# Altium PCB RFM95W.PcbDoc
Units mm, origin at the board's own origin, x right, y up, seen from the top; angles counter-clockwise.
Board outline 31 x 25.5 mm, 2 copper layers (Top Layer, Bottom Layer), stack 1.671 mm thick; 4 components, 14 nets, 35 pads, 0 vias.
Unrouted connection lines stored in the file: 2.
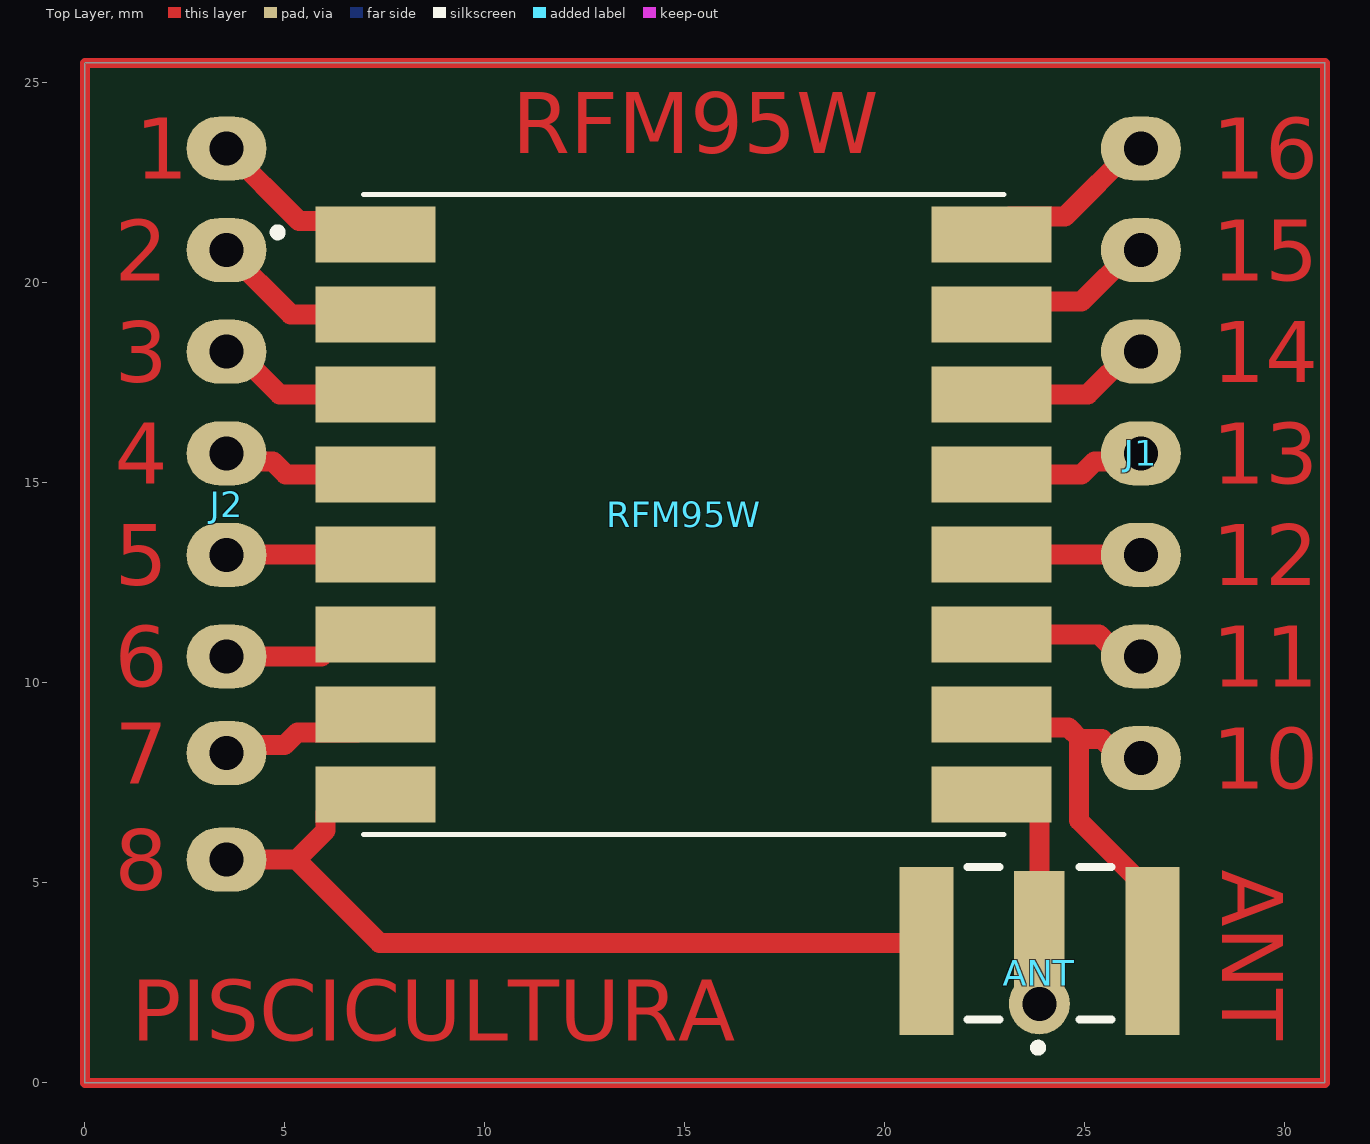
[diagram p0: Top Layer view]
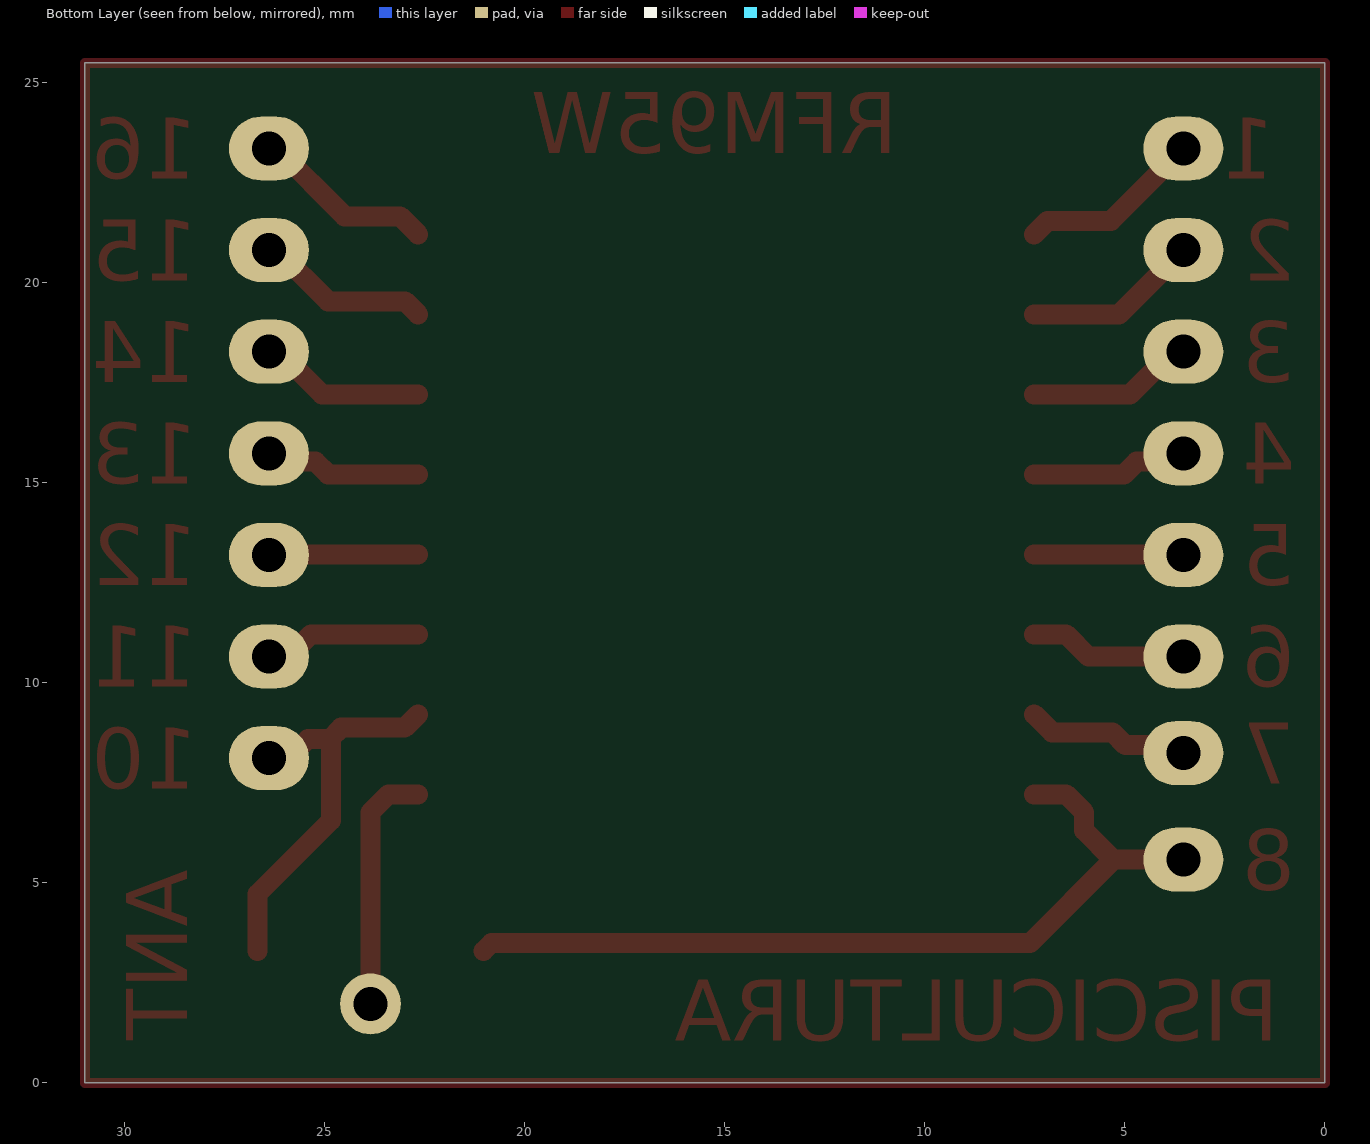
[diagram p1: Bottom Layer view, seen from below]
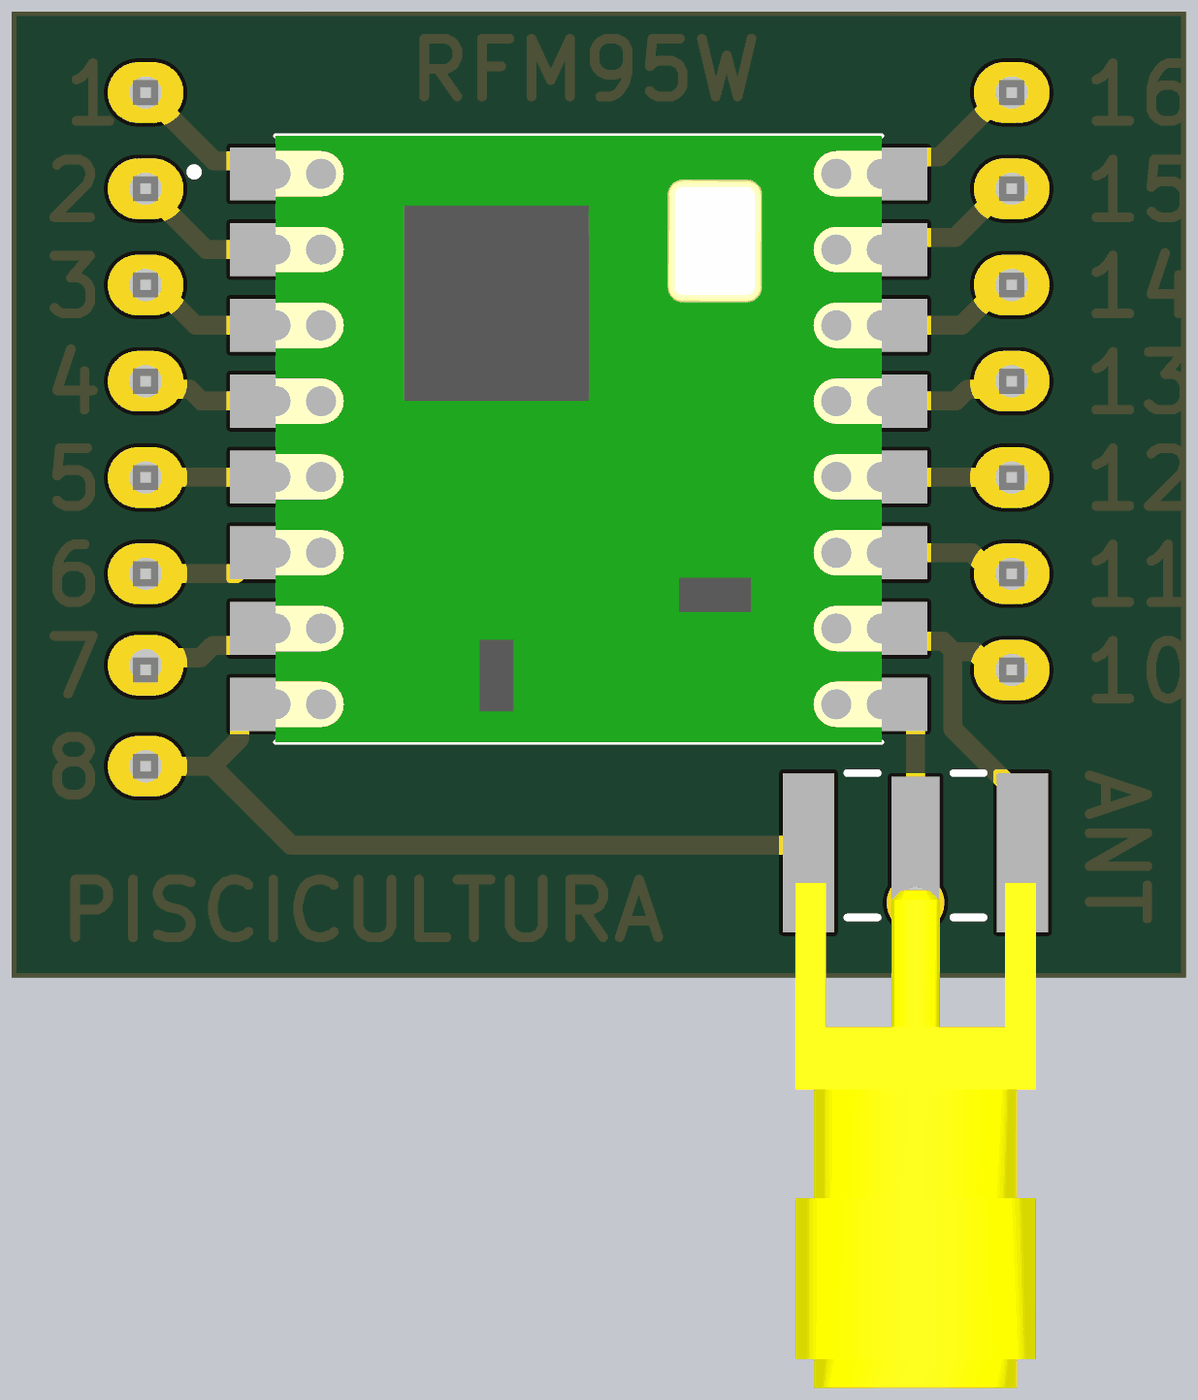
[diagram p2: 3D render of the assembled board from above, using the file's embedded part models]

## Layer stack, top to bottom
Top Solder: solder mask 0.0102, Solder Resist, Dk 3.5
Top Layer: signal copper 0.0356
Dielectric 1: dielectric 1.6, FR-4, Dk 4.8
Bottom Layer: signal copper 0.0356
Bottom Solder: solder mask 0.0102, Solder Resist, Dk 3.5

## Board outline
0,25.5 0,0 31,0 31,25.5

## Design rules (kind name [scope] priority, off if disabled: settings)
Clearance [All] p1: gap=0.4 ignorepadtopadclearanceinfootprint=FALSE
DiffPairsRouting [All] p1: maxlimit=0.254 minlimit=0.254 mostfreqgap=0.254 toplayer_minwidth=0.381 toplayer_maxwidth=0.381 toplayer_prefwidth=0.381 bottomlayer_minwidth=0.381 bottomlayer_maxwidth=0.381 bottomlayer_prefwidth=0.381 substack1={8DDF439F-6846-4610-86AD-6864254210AB} toplayer_{8ddf439f-6846-4610-86ad-6864254210ab}_minwidth=0.381 toplayer_{8ddf439f-6846-4610-86ad-6864254210ab}_maxwidth=0.381 toplayer_{8ddf439f-6846-4610-86ad-6864254210ab}_prefwidth=0.381 bottomlayer_{8ddf439f-6846-4610-86ad-6864254210ab}_minwidth=0.381 bottomlayer_{8ddf439f-6846-4610-86ad-6864254210ab}_maxwidth=0.381 bottomlayer_{8ddf439f-6846-4610-86ad-6864254210ab}_prefwidth=0.381 maxuncoupledlength=12.7
PolygonConnect [All] p1: connectstyle=Relief reliefconductorwidth=0.254 reliefentries=4 polygonreliefangle="90 Angle" airgapwidth=0.254
RoutingVias [All] p1: holewidth=0.3 width=0.6 viastyle="Through Hole" minholewidth=0.3 minwidth=0.6 maxholewidth=0.3 maxwidth=0.6
SolderMaskExpansion [All] p1: expansion=0.102 istentingtop=FALSE
Width [All] p1: maxlimit=0.5 minlimit=0.254 preferedwidth=0.254 substack1={8DDF439F-6846-4610-86AD-6864254210AB} minimp=50.000000 maximp=50.000000 favimp=50.000000
29 further rules are at their usual default settings.

## Components (designator, comment, footprint, x,y, rotation, side; value= is the part's Value field where it differs from the comment)
ANT "SMA-J-P-H-ST-EM1" SAMTEC_SMA-J-P-H-ST-EM1 23.86,3.5 r180 top
J1 "1x6 Header" HDR1X7 26.4,23.36 r0 top
J2 "1x8 Header" HDR1X8 3.54,23.36 r0 top
RFM95W "RFM95W-915S2" XCVR_RFM95W-915S2 14.97,14.215 r0 top

## Footprints (in the part's own frame and the unit in brackets; to place one, negate y for a bottom-side part, rotate by r counter-clockwise, add the part's x,y. Pads: shape width x height; smd on the part's side, far side on the other; paste and mask are expansions set on the pad)
HDR1X7 [mm]
  oval 2x1.6 hole 0.85 unplated: 10(0,-15.24) 11(0,-12.7) 12(0,-10.16) 13(0,-7.62) 14(0,-5.08) 15(0,-2.54) 16(0,0)
  body extent -1.18,-16.38 1.18,1.14, height 10.92
HDR1X8 [mm]
  oval 2x1.6 hole 0.85 unplated: 1(0,0) 2(0,-2.54) 3(0,-5.08) 4(0,-7.62) 5(0,-10.16) 6(0,-12.7) 7(0,-15.113) 8(0,-17.78)
  body extent -1.18,-18.92 1.18,1.14, height 1.52
SAMTEC_SMA-J-P-H-ST-EM1 [mm]
  round 1.524 hole 0.85 unplated: 1(0,1.524)
  rect 1.27x3.6 smd: 1(0,0)
  rect 1.35x4.2 smd: 2_1(-2.825,0.2) 3_1(2.825,0.2)
  silkscreen extent -1.8,-1.9 1.8,2.72, body extent -3.17,0.99 3.17,14.32, height 3.17
XCVR_RFM95W-915S2 [mm]
  rect 3x1.4 smd: 1(-7.7,7) 2(-7.7,5) 3(-7.7,3) 4(-7.7,1) 5(-7.7,-1) 6(-7.7,-3) 7(-7.7,-5) 8(-7.7,-7) 9(7.7,-7) 10(7.7,-5) 11(7.7,-3) 12(7.7,-1) 13(7.7,1) 14(7.7,3) 15(7.7,5) 16(7.7,7)
  silkscreen extent -10.25,-8 8,8, body extent -8,-8 8,8, height 1.8

## Part data
ANT: "SMA Connector Jack, Female Socket 50Ohm Board Edge, End Launch Solder", Package=None, Digi-Key_Part_Number=SAM8857-ND, MF=Samtec, MP=SMA-J-P-H-ST-EM1, SnapEDA_Link=https://www.snapeda.com/parts/SMA-J-P-H-ST-EM1/Samtec%20Inc./view-part/134500/?ref=snap, Toby_UK-Purchase-URL=https://snapeda.com/shop?store=Toby+UK&id=134500
J1: library part 22-10-2061_1, "CONN HEADER VERT 7POS 2.54MM", Color=White, Contact Resistance=10mR, Current Rating=4A, Flammability Rating="UL94 V-0", Housing Color=Black, Insulation Resistance=50GR, Manufacturer=Molex, Manufacturer Part Number=22-10-2061, Max Operating Temperature=75°C, Min Operating Temperature=0°C, Package Quantity=10, Supplier Part Number 1=23-0022102071-ND, Voltage Rating=250V, Category="Headers and Wire Housings", ComponentLink1Description=https://datasheet.ciiva.com/711/022032041-sd-711929.pdf?src-supplier=Digi-Key, ComponentLink1URL=https://datasheet.ciiva.com/711/022032041-sd-711929.pdf?src-supplier=Digi-Key, ComponentLink2Description=https://datasheet.ciiva.com/5158/0022102061-pcb-headers-158488-5158499.pdf?src-supplier=Mouser, ComponentLink2URL=https://datasheet.ciiva.com/5158/0022102061-pcb-headers-158488-5158499.pdf?src-supplier=Mouser, ComponentLink3Description=https://datasheet.ciiva.com/10086/0022102061-pcb-headers-10086323.pdf?src-supplier=Avnet, ComponentLink3URL=https://datasheet.ciiva.com/10086/0022102061-pcb-headers-10086323.pdf?src-supplier=Avnet, ComponentLink4Description=https://datasheet.ciiva.com/19461/1965971-19461525.pdf?src-supplier=Jameco, ComponentLink4URL=https://datasheet.ciiva.com/19461/1965971-19461525.pdf?src-supplier=Jameco, ComponentLink5Description=https://datasheet.ciiva.com/30196/0022102061-pcb-headers-30196683.pdf?src-supplier=Onlinecomponents.com, ComponentLink5URL=https://datasheet.ciiva.com/30196/0022102061-pcb-headers-30196683.pdf?src-supplier=Onlinecomponents.com, ComponentLink6Description=https://datasheet.ciiva.com/16727/0022102061-pcb-headers-16727098.pdf?src-supplier=Avnet+Europe, ComponentLink6URL=https://datasheet.ciiva.com/16727/0022102061-pcb-headers-16727098.pdf?src-supplier=Avnet+Europe, Connector Type="Male Pin", Contact Material=Brass, Contact Mating Length=0.295inch, Contact Plating=Gold,Copper,Tin, Contact Type="Male Pin", Depth=9.02mm, Gender=Male, Glow Wire Compliant=Non-compliant, Halogen Free="Low Halogen", Height=14.68mm, Housing Material=Nylon, Length=95mm, Mount="Through Hole", Number of Circuits=6, Number of Contacts=6, Number of Positions=6, Number of Rows=1, Orientation=Straight, Packaging=Bulk, Pitch=2.54mm, Pricing 1="1=1.33000, 10=1.10400, 100=0.92000, 1000=0.73600, 5000=0.64400, 10000=0.61180 (USD)", Radiation Hardening=No, REACH SVHC=Unknown, RoHS=Yes, RoHS Compliant=Yes, Series="KK® 4030", Stock 1=3643, Supplier 1=Digi-Key, Termination=Solder, Voltage Rating (DC)=250V
J2: library part 22-10-2061, "CONN HEADER VERT 8POS 2.54MM", Color=White, Contact Resistance=10mR, Current Rating=4A, Flammability Rating="UL94 V-0", Housing Color=Black, Insulation Resistance=50GR, Manufacturer=Molex, Max Operating Temperature=75°C, Min Operating Temperature=0°C, Package Quantity=10, Supplier Part Number 1=23-0022102081-ND, Voltage Rating=250V, Category="Headers and Wire Housings", ComponentLink1Description=https://datasheet.ciiva.com/711/022032041-sd-711929.pdf?src-supplier=Digi-Key, ComponentLink1URL=https://datasheet.ciiva.com/711/022032041-sd-711929.pdf?src-supplier=Digi-Key, ComponentLink2Description=https://datasheet.ciiva.com/5158/0022102061-pcb-headers-158488-5158499.pdf?src-supplier=Mouser, ComponentLink2URL=https://datasheet.ciiva.com/5158/0022102061-pcb-headers-158488-5158499.pdf?src-supplier=Mouser, ComponentLink3Description=https://datasheet.ciiva.com/10086/0022102061-pcb-headers-10086323.pdf?src-supplier=Avnet, ComponentLink3URL=https://datasheet.ciiva.com/10086/0022102061-pcb-headers-10086323.pdf?src-supplier=Avnet, ComponentLink4Description=https://datasheet.ciiva.com/19461/1965971-19461525.pdf?src-supplier=Jameco, ComponentLink4URL=https://datasheet.ciiva.com/19461/1965971-19461525.pdf?src-supplier=Jameco, ComponentLink5Description=https://datasheet.ciiva.com/30196/0022102061-pcb-headers-30196683.pdf?src-supplier=Onlinecomponents.com, ComponentLink5URL=https://datasheet.ciiva.com/30196/0022102061-pcb-headers-30196683.pdf?src-supplier=Onlinecomponents.com, ComponentLink6Description=https://datasheet.ciiva.com/16727/0022102061-pcb-headers-16727098.pdf?src-supplier=Avnet+Europe, ComponentLink6URL=https://datasheet.ciiva.com/16727/0022102061-pcb-headers-16727098.pdf?src-supplier=Avnet+Europe, Connector Type="Male Pin", Contact Material=Brass, Contact Mating Length=0.295inch, Contact Plating=Gold,Copper,Tin, Contact Type="Male Pin", Depth=9.02mm, Gender=Male, Glow Wire Compliant=Non-compliant, Halogen Free="Low Halogen", Height=14.68mm, Housing Material=Nylon, Length=95mm, Manufacturer Part Number=22-10-2061, Mount="Through Hole", Number of Circuits=6, Number of Contacts=6, Number of Positions=6, Number of Rows=1, Orientation=Straight, Packaging=Bulk, Pitch=2.54mm, Pricing 1="1=1.33000, 10=1.10400, 100=0.92000, 1000=0.73600, 5000=0.64400, 10000=0.61180 (USD)", Radiation Hardening=No, REACH SVHC=Unknown, RoHS=Yes, RoHS Compliant=Yes, Series="KK® 4030", Stock 1=3643, Supplier 1=Digi-Key, Termination=Solder, Voltage Rating (DC)=250V
RFM95W: "RFM95(W) - Low Power Long Range Transceiver Module V1.0", Package=None, Availability=Unavailable, MF="{'manufacturer': u'RF Solutions'}", MP=RFM95W-915S2, Price=None

## Nets (pads, with @x,y where several pads share a name; then routed paths per layer and width w, separated by ;. In a path a pad name is that pad's centre, name@x,y a point inside that pad or via, vN(x,y) a via of type N, cw(c..) or ccw(c..) an arc to the next point about the centre after c; other vN are vias at no path point)
+3.3V: J1.13 RFM95W.13 | length 3.9
  Top Layer w0.5: RFM95W.13 24.92,15.215 25.235,15.53 26.19,15.53 J1.13
ANT: ANT.1 RFM95W.9 | length 6.1
  Top Layer w0.5: RFM95W.9 23.41,7.215 23.86,6.765 ANT.1@23.86,2.04
DIO0: J1.14 RFM95W.14 | length 4.2
  Top Layer w0.5: RFM95W.14 25.073,17.215 26.138,18.28 J1.14
DIO1: J1.15 RFM95W.15 | length 4.4
  Top Layer w0.5: RFM95W.15 22.995,19.54 24.92,19.54 26.2,20.82 J1.15
DIO2: J1.16 RFM95W.16 | length 4.6
  Top Layer w0.5: RFM95W.16 23.12,21.665 24.505,21.665 26.2,23.36 J1.16
DIO3: J1.11 RFM95W.11 | length 4
  Top Layer w0.5: RFM95W.11 25.347,11.215 25.902,10.66 J1.11
DIO4: J1.12 RFM95W.12 | length 3.7
  Top Layer w0.5: RFM95W.12 22.677,13.207 26.392,13.207 J1.12
DIO5: J2.7 RFM95W.7 | length 4.1
  Top Layer w0.5: J2.7 3.736,8.443 4.991,8.443 5.313,8.765 6.82,8.765 RFM95W.7
GND: ANT.2_1 ANT.3_1 J1.10 J2.1 J2.8 RFM95W.1 RFM95W.8 RFM95W.10 | length 36.2
  Top Layer w0.5: J2.8 5.29,5.58 ; J2.1 5.347,21.553 6.932,21.553 RFM95W.1 ; RFM95W.8 6.47,7.215 6.02,6.765 6.02,6.31 5.29,5.58 ; ANT.3_1 20.835,3.5 7.37,3.5 5.29,5.58 ; RFM95W.10 23.005,8.88 24.595,8.88 24.875,8.6 ; J1.10 25.902,8.12 25.422,8.6 24.875,8.6 ; ANT.2_1 26.685,4.725 24.85,6.56 24.85,8.575 24.875,8.6
MISO: J2.2 RFM95W.2 | length 4.4
  Top Layer w0.5: J2.2 5.145,19.215 RFM95W.2
MOSI: J2.3 RFM95W.3 | length 4.2
  Top Layer w0.5: J2.3 3.802,18.28 4.867,17.215 RFM95W.3
NSS: J2.5 RFM95W.5 | length 3.7
  Top Layer w0.5: J2.5 3.548,13.207 7.263,13.207 RFM95W.5
RESET: J2.6 RFM95W.6 | length 4
  Top Layer w0.5: J2.6 5.915,10.66 6.47,11.215 RFM95W.6
SCK: J2.4 RFM95W.4 | length 3.9
  Top Layer w0.5: J2.4 3.75,15.53 4.705,15.53 5.02,15.215 RFM95W.4
copper on no net: | length 113
  Top Layer w0.254: 0,0 31,0 31,25.5 0,25.5 0,0

## Polygon pours and split planes (outlines as drawn)
no net on Top Solder (none): 0.975,2.875 18.775,2.875 18.775,0.85 18.7,0.925 0.975,0.925

## Other copper
Top Layer:
  text "PISCICULTURA" at 1.154,1.054 h1.52

## Text inside footprints (layer, text, board x,y; h text height)
J1: Top Layer "10" at 28.178,7.358 h1.52; Top Layer "11" at 28.178,9.898 h1.52; Top Layer "12" at 28.178,12.438 h1.52; Top Layer "13" at 28.178,14.978 h1.52; Top Layer "14" at 28.178,17.518 h1.52; Top Layer "15" at 28.178,20.058 h1.52; Top Layer "16" at 28.178,22.598 h1.52
J2: Top Layer "8" at 0.746,4.818 h1.52; Top Layer "7" at 0.746,7.485 h1.52; Top Layer "6" at 0.746,9.898 h1.52; Top Layer "5" at 0.746,12.438 h1.52; Top Layer "4" at 0.746,14.978 h1.52; Top Layer "3" at 0.746,17.518 h1.52; Top Layer "2" at 0.746,20.058 h1.52; Top Layer "1" at 1.254,22.598 h1.52